# Altium PCB EST_MainV20.PcbDoc (part 6 of 7)
Units mil, origin at the board's own origin, x right, y up, seen from the top; angles counter-clockwise.
Board outline 2745 x 4540 mil, 2 copper layers (Top Layer, Bottom Layer); 326 components, 241 nets, 1052 pads, 399 vias.
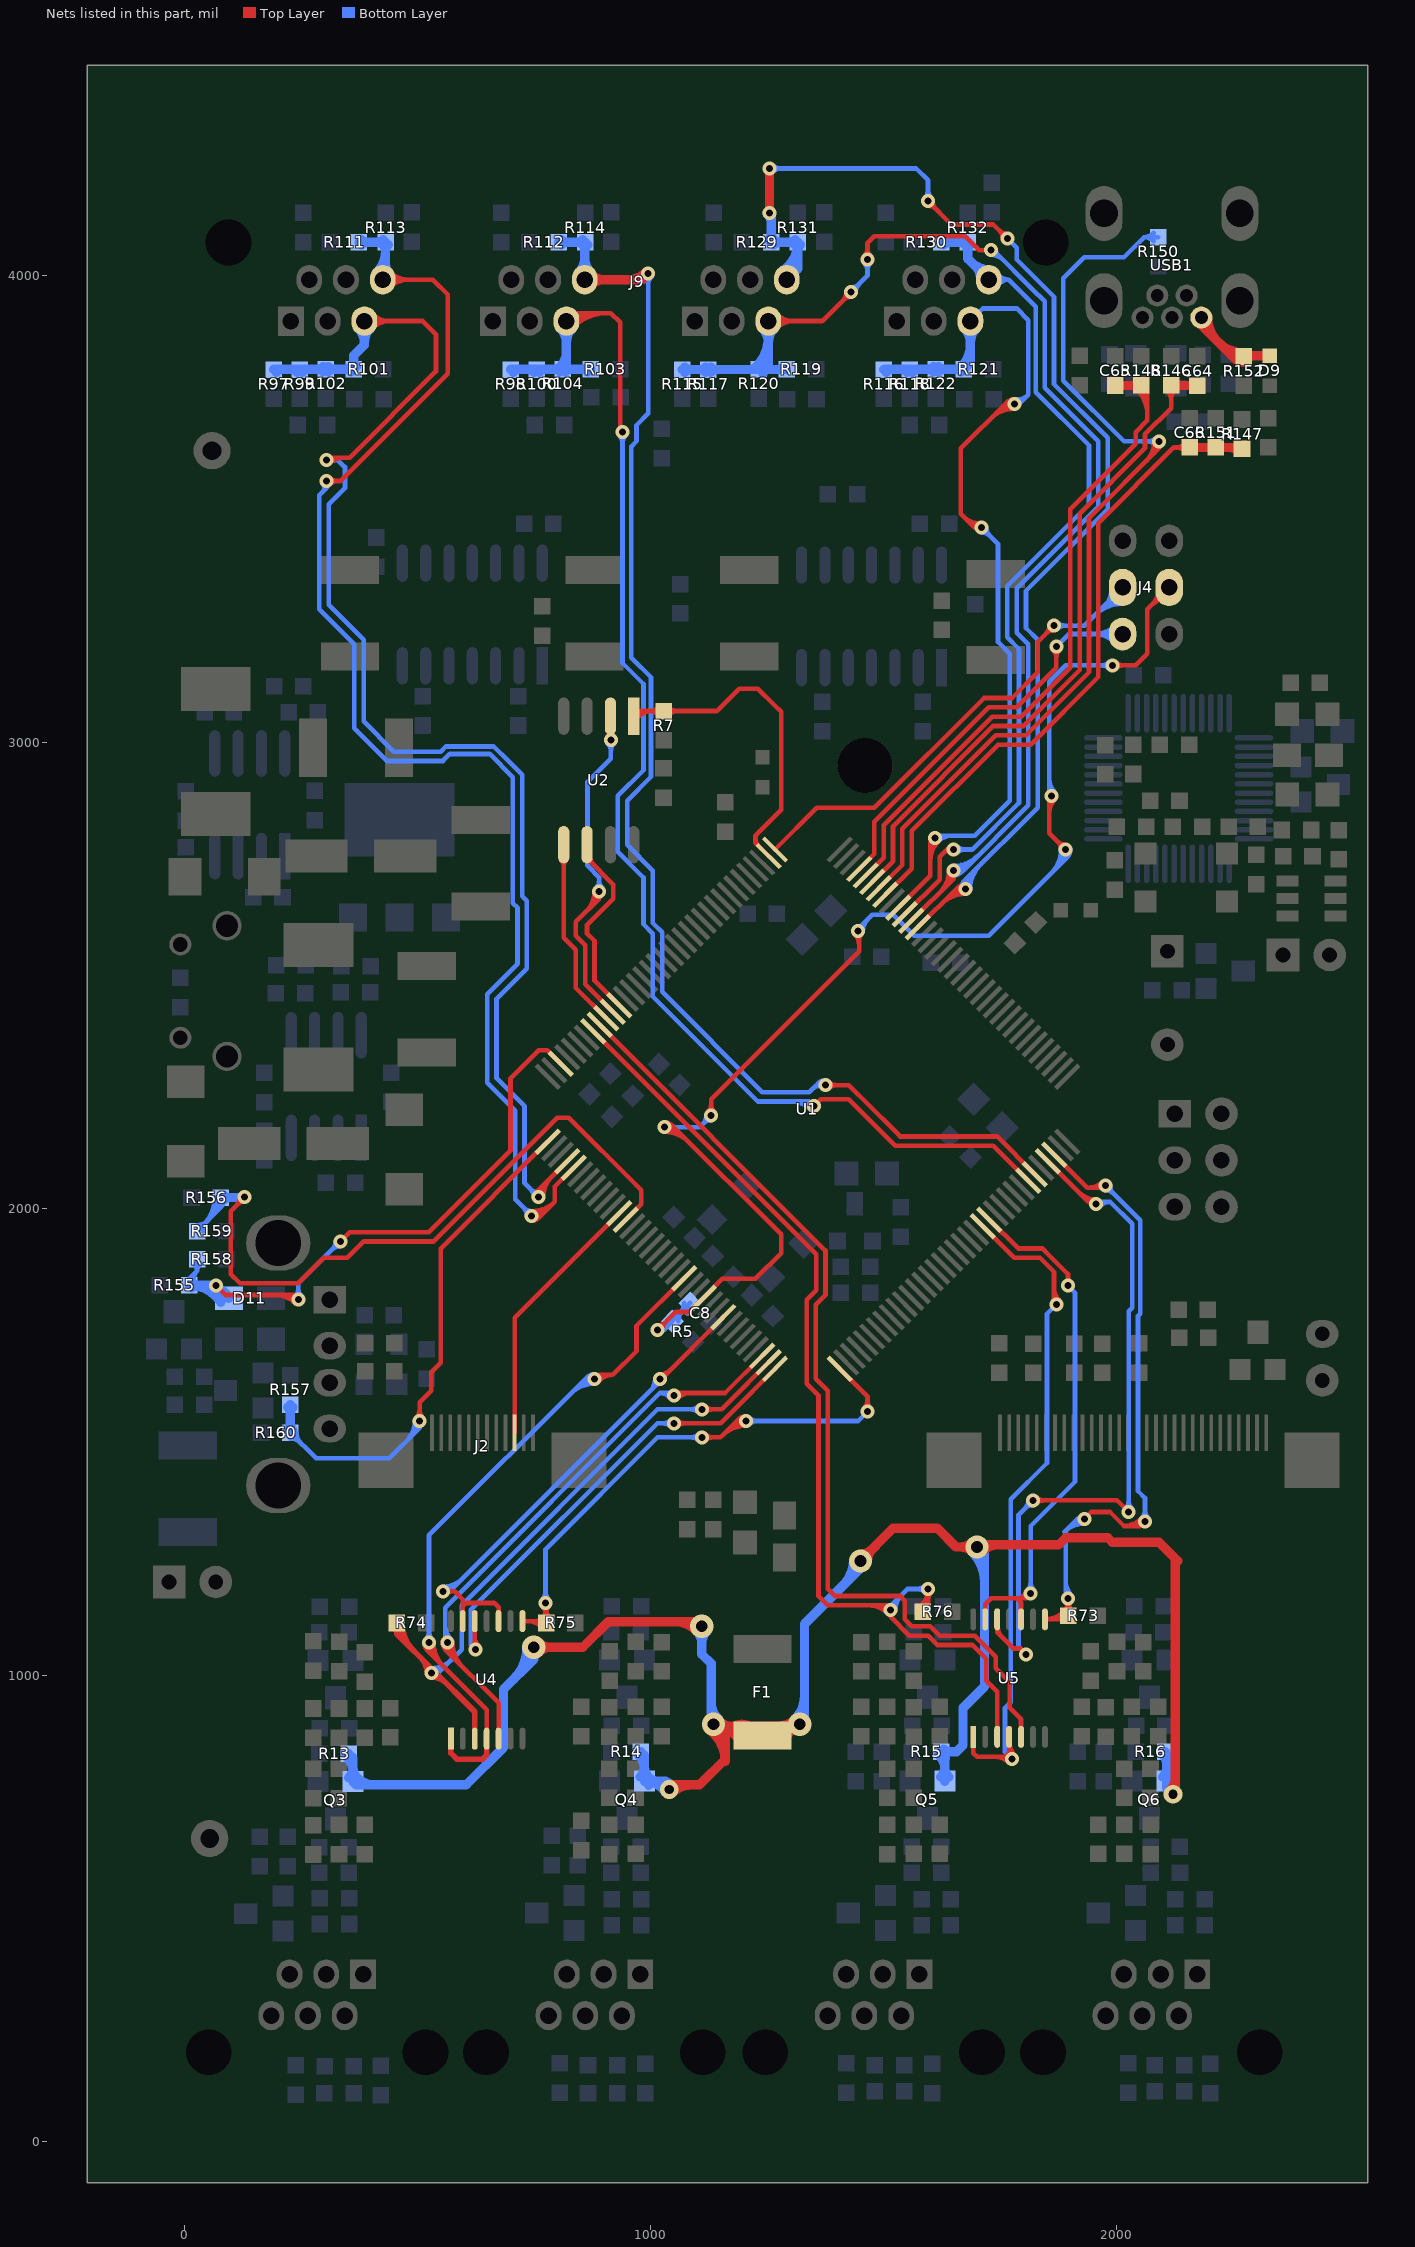
[diagram p6: the nets of this part, all layers, seen from the top]

## Via types
v1: diameter 30, hole 15, Top Layer to Bottom Layer, 237 vias
v2: diameter 50, hole 25, Top Layer to Bottom Layer, 93 vias
v3: diameter 40, hole 20, Top Layer to Bottom Layer, 68 vias
v4: diameter 60, hole 25, Top Layer to Bottom Layer, 1 vias

## Nets (pads, with @x,y where several pads share a name; then routed paths per layer and width w, separated by ;. In a path a pad name is that pad's centre, name@x,y a point inside that pad or via, vN(x,y) a via of type N, cw(c..) or ccw(c..) an arc to the next point about the centre after c; other vN are vias at no path point) (continued)
PB_CON: R157.2 R160.2 U1.1 | length 1335.2
  Top Layer w10: v1@497.93,1552.07 ccw(c480.86,1569.14) 505,1569.14 ccw(c529.14,1569.14) v1@512.07,1552.07 ; v1(505,1545) 505,1585 530,1610 530,1650 550,1670 550,1914.71 779.06,2143.77 U1.1@779.73,2143.77
  Bottom Layer w10: R160.2@227.99,1507.3 cw(c227.99,1476.6) 249.7,1498.31 cw(c271.41,1520.02) R160.2@240.71,1520.02 ; R160.2@227.99,1520.02 283.01,1465 440,1465 505,1530 v1(505,1545) cw(c468.79,1545) 494.39,1519.39 ; 477.32,1502.32 ccw(c434.64,1545) v1@495,1545
  Bottom Layer w20: R160.2@222.54,1525.47 ccw(c209.36,1538.65) 227.99,1538.65 ccw(c246.62,1538.65) R160.2@233.45,1525.47 ; R157.2@222.56,1574.55 cw(c209.44,1561.44) 227.99,1561.44 ; R160.2@227.99,1520.02 R157.2@228.02,1580.01 ; 227.99,1561.32 cw(c246.7,1561.32) R157.2@233.47,1574.55
PB_DET: D11.1 R155.1 R158.2 U1.142 | length 1653.5
  Top Layer w10: v1(68.02,1835.98) 89,1815 235,1815 v1(245,1805) ccw(c220.86,1780.86) 220.86,1815 ; 196.72,1815 cw(c196.72,1756.72) v1@237.93,1797.93 ; v1(335,1930) 355,1950 525,1950 700,2125 700,2280 760,2340 778.37,2340 U1.142@807.57,2310.8
  Bottom Layer w10: R155.1@11,1835.98 11,1850 28.01,1867.01 ; R155.1@13.51,1837.02 cw(c30,1843.79) 17.39,1856.39 ; R158.2@20.53,1881.7 cw(c9.84,1867.01) 28.01,1867.01 ; R155.1@22.76,1840.82 cw(c45.04,1849.98) 28.01,1867.01 ; R158.2@28.01,1891.98 28.01,1867.01 ; R158.2@35.49,1881.7 ccw(c46.17,1867.01) 28.01,1867.01 ; v1@237.93,1812.07 ccw(c220.86,1829.14) 245,1829.14 ccw(c269.14,1829.14) v1@252.07,1812.07 ; v1(245,1805) 245,1840 v1(335,1930) ; v1@325,1930 cw(c300.86,1930) 317.93,1912.93 cw(c335,1895.86) v1@335,1920
  Bottom Layer w20: R155.1@16.46,1830.53 cw(c29.63,1817.35) 29.63,1835.98 cw(c29.63,1854.61) R155.1@16.46,1841.44 ; 48.22,1835.98 cw(c48.22,1779.69) D11.1@95.17,1810.76 ; D11.1@78.49,1799.72 ccw(c11,1755.05) R155.1@11,1835.98 v1(68.02,1835.98) D11.1@96,1808
PB_VOL: R156.1 R159.2 U1.13 | length 1753.9
  Top Layer w10: v1@120,2025 cw(c95.86,2025) 112.93,2007.93 cw(c130,1990.86) v1@130,2015 ; v1(130,2025) 100,1995 100,1860 120,1840 245,1840 300,1895 350,1895 385,1930 535,1930 800,2195 825,2195 970,2050 980,2040 980,2009.97 U1.13@946.77,1976.73
  Bottom Layer w10: R159.2@28.01,1951.98 79,2002.98 R156.1@79,2023.98 ; R159.2@28.01,1964.7 ccw(c28.01,1995.4) 49.72,1973.69 ccw(c71.42,1951.98) R159.2@40.72,1951.98 ; R159.2@42.44,1966.41 ccw(c-15.13,2023.98) R156.1@66.28,2023.98 ; 59.51,1983.48 ccw(c19.01,2023.98) R156.1@76.28,2023.98 ; 76.58,2000.55 ccw(c53.15,2023.98) R156.1@86.28,2023.98
  Bottom Layer w20: R156.1@79,2019 R156.1@79,2023.98 128.98,2023.98 v1(130,2025) ; R156.1@84.46,2018.53 cw(c97.63,2005.35) 97.63,2023.98 cw(c97.63,2042.61) R156.1@84.46,2029.44
RED: J2.3 U1.12 | length 563.5
  Top Layer w10: J2.3@708.63,1520 708.63,1766.44 U1.12@932.85,1990.65
RST: C8.2 J4.4 R5.1 U1.25 | length 3644.1
  Top Layer w10: v1(1015,1740) 1053.87,1778.87 1082.96,1778.87 U1.25@1113.8,1809.7 1154.1,1850 1225,1850 1280,1905 1280,1945 1050,2175 v1(1030,2175) cw(c1030,2126.72) 1064.14,2160.86 ; v1@1015,1750 ccw(c1015,1774.14) 1032.07,1757.07 ccw(c1049.14,1740) v1@1025,1740 ; v1@1030,2165 cw(c1030,2092.57) 1081.21,2143.79 ; v1@1030,2185 cw(c1030,2160.86) 1047.07,2177.93 ; v1@1122.93,2207.07 ccw(c1105.86,2224.14) 1130,2224.14 ccw(c1154.14,2224.14) v1@1137.07,2207.07 ; v1(1130,2200) 1130,2235 1447.5,2552.5 v1@1447.5,2592.5 ; v1@1437.93,2587.93 cw(c1414.82,2564.82) 1447.5,2564.82 ; 1447.5,2576.89 cw(c1463.11,2576.89) v1@1452.07,2587.93 ; 1855,2848.79 cw(c1896.21,2848.79) v1@1867.07,2877.93 ; v1@1855,2880 1855,2805 v1(1890,2770) ; v1@1880,2770 ccw(c1855.86,2770) 1872.93,2787.07 ccw(c1890,2804.14) v1@1890,2780 ; v1(1990,3165) 2040,3165 2065,3190 2065,3285 J4.4@2112,3332 ; v1@1997.07,3157.93 cw(c2014.14,3140.86) 2014.14,3165 cw(c2014.14,3189.14) v1@1997.07,3172.07 ; 2074.48,3294.48 cw(c2105.56,3263.41) J4.4@2110.4,3307.09 ; 2077.53,3297.53 ccw(c2053.54,3321.53) J4.4@2087.47,3321.53
  Bottom Layer w10: v1@1017.01,1749.8 ccw(c1023.6,1782.01) R5.1@1046.86,1758.76 ; v1(1030,2175) 1105,2175 v1(1130,2200) ; 1033.72,1745.62 cw(c1019.14,1760.2) v1(1015,1740) 1028.1,1740 R5.1@1046.86,1758.76 ; v1@1037.07,2167.93 cw(c1054.14,2150.86) 1054.14,2175 cw(c1054.14,2199.14) v1@1037.07,2182.07 ; R5.1@1046.86,1771.48 ccw(c1046.86,1799.19) 1066.45,1779.59 ; R5.1@1059.57,1758.76 cw(c1093.26,1758.76) 1069.44,1782.58 ; C8.2@1072.12,1797.98 cw(c1041.42,1797.98) 1063.13,1776.27 cw(c1084.83,1754.56) C8.2@1084.83,1785.26 ; 1074.73,1780.27 1080,1775 ; C8.2@1084.83,1797.98 1046.86,1760 R5.1@1046.86,1758.76 ; v1@1120,2200 cw(c1095.86,2200) 1112.93,2182.93 cw(c1130,2165.86) v1@1130,2190 ; v1(1445,2595) 1445,2600 1475,2630 1520,2630 1565,2585 1725,2585 1890,2750 v1(1890,2770) cw(c1841.72,2770) 1875.86,2735.86 ; v1@1445,2605 ccw(c1445,2617.07) 1453.54,2608.54 ; v1@1455,2595 cw(c1491.21,2595) 1465.61,2620.61 ; v1@1855,2880 1855,3130 1890,3165 v1(1990,3165) ; 1855,2921.21 ccw(c1896.21,2921.21) v1@1867.07,2892.07 ; 1858.79,2718.79 ccw(c1807.57,2770) v1@1880,2770 ; 1892.93,2752.93 ccw(c1875.86,2770) v1@1900,2770 ; v1@1982.93,3157.93 ccw(c1965.86,3140.86) 1965.86,3165 ccw(c1965.86,3189.14) v1@1982.93,3172.07
  other v1: 1860,2885
RXINA: R74.2 U1.35 U4.3 | length 1771
  Top Layer w10: v1(1110,1570) 1152.49,1570 1167.49,1585 U1.35@1252.99,1670.51 ; v1@1117.07,1562.93 cw(c1134.14,1545.86) 1134.14,1570 cw(c1134.14,1594.14) v1@1117.07,1577.07
  Top Layer w12: R74.2@455.72,1112.02 ccw(c510.62,1112.02) 471.8,1073.2 ; R74.2@456.01,1112.02 456.01,1088.99 ; R74.2@467.72,1112.02 ccw(c551.6,1112.02) 492.29,1052.71 ; 507.56,1037.44 cw(c475.13,1005) v1@521,1005 ; v1@530,996 cw(c530,950.13) 562.44,982.56 ; v1@530,1010 v1@532.5,1012.5 ; U4.3@623.18,864 623.18,921.82 v1@532.5,1012.5 ; 456.01,1088.99 ccw(c439.25,1088.99) 449.11,1102.54 cw(c439.25,1088.99) 456.01,1088.99 ; 456.01,1088.99 cw(c472.77,1088.99) 462.9,1102.54 ccw(c472.77,1088.99) 456.01,1088.99 ; 456.01,1088.99 v1@532.5,1012.5
  Bottom Layer w10: v1@530,1015 ccw(c530,1075.36) 572.68,1032.68 ; 555.61,1015.61 cw(c530,1041.21) v1(530,1005) 545,1005 595,1055 595,1150 1015,1570 v1(1110,1570) ; v1@1102.93,1562.93 ccw(c1085.86,1545.86) 1085.86,1570 ccw(c1085.86,1594.14) v1@1102.93,1577.07
RXINA_EN: U1.22 U4.1 U4.4 | length 1769
  Top Layer w10: v1@515,1070 ccw(c539.14,1070) 522.07,1052.93 ; v1@535,1070 ccw(c607.43,1070) 556.21,1018.79 ; 539.14,1035.86 cw(c573.28,1070) v1(525,1070) 525,1050 648.77,926.23 U4.4@648.77,864 ; v1@887.87,1628.83 cw(c918.94,1604.44) 918.94,1643.94 ; 898.37,1643.94 ccw(c898.37,1620.58) v1(880,1635) 888.94,1643.94 918.94,1643.94 ; U1.22@1072.04,1851.46 970,1749.42 970,1695 918.94,1643.94
  Top Layer w12: U4.1@572,864 572,833 585,820 640,820 648.77,828.77 U4.4@648.77,864
  Bottom Layer w10: v1@517.93,1077.07 ccw(c500.86,1094.14) 525,1094.14 ccw(c549.14,1094.14) v1@532.07,1077.07 ; v1(525,1070) 525,1300 860,1635 v1(880,1635) ccw(c880,1586.72) 845.86,1620.86 ; 828.79,1603.79 cw(c880,1552.57) v1@880,1625 ; 862.93,1637.93 cw(c880,1620.86) v1@880,1645
RXINB: R75.2 U1.37 U4.8 | length 1576.4
  Top Layer w10: U4.8@725.54,1115.97 735,1115.97 772.06,1115.97 R75.2@776.01,1112.02 776.01,1153.99 v1(775,1155) ; 735.77,1115.97 cw(c735.77,1071.77) R75.2@767.02,1103.02 ; 754.85,1115.97 ccw(c754.85,1133.17) 767.02,1121.01 ccw(c745.31,1142.72) 776.01,1142.72 ccw(c806.71,1142.72) R75.2@785,1121.01 ; v1@767.93,1147.93 cw(c748.42,1128.42) R75.2@776.01,1128.42 ; 776.01,1133.29 cw(c796.71,1133.29) v1@782.07,1147.93 ; v1(1110,1510) 1150,1510 1185,1545 v1(1205,1545) ccw(c1205,1496.72) 1170.86,1530.86 ; v1@1117.07,1502.93 cw(c1134.14,1485.86) 1134.14,1510 cw(c1134.14,1534.14) v1@1117.07,1517.07 ; 1153.79,1513.79 cw(c1205,1462.57) v1@1205,1535 ; 1187.93,1547.93 cw(c1205,1530.86) v1@1205,1555 ; U1.37@1406.11,1656.59 1465,1597.69 v1(1465,1565) ; v1@1457.93,1572.07 ccw(c1440.86,1589.14) 1465,1589.14 ccw(c1489.14,1589.14) v1@1472.07,1572.07
  Bottom Layer w10: v1@767.93,1162.07 ccw(c750.86,1179.14) 775,1179.14 ccw(c799.14,1179.14) v1@782.07,1162.07 ; v1(775,1155) 775,1270 1015,1510 v1(1110,1510) ; v1@1102.93,1502.93 ccw(c1085.86,1485.86) 1085.86,1510 ccw(c1085.86,1534.14) v1@1102.93,1517.07 ; v1(1205,1545) 1445,1545 v1(1465,1565) ; v1@1212.07,1537.93 cw(c1229.14,1520.86) 1229.14,1545 cw(c1229.14,1569.14) v1@1212.07,1552.07
RXINB_EN: U1.28 U4.10 U4.13 | length 1203.4
  Top Layer w10: v1(555,1180) 580,1180 597.59,1162.41 597.59,1147.59 ; U4.13@597.59,1115.97 597.59,1147.59 ; U4.10@674.36,1115.97 674.36,1145.64 665,1155 605,1155 597.59,1147.59 ; v1(1020,1635) 1022.61,1635 U1.28@1155.56,1767.94 ; v1@1020,1645 ccw(c1020,1675.45) 1041.53,1653.92 ; v1@1030,1635 cw(c1047.83,1635) 1035.22,1647.61
  Bottom Layer w10: v1@555,1190 ccw(c555,1250.36) 597.68,1207.68 ; 580.61,1190.61 cw(c555,1216.21) v1(555,1180) 570,1180 v1@1020,1630 ; 999.39,1609.39 ccw(c973.79,1635) v1@1010,1635 ; 1011.46,1621.46 cw(c1020,1612.93) v1@1020,1625
RXINC: R76.2 U1.137 U5.3 | length 2462.2
  Top Layer w10: U1.137@877.17,2380.4 1355,1902.56 1355,1825 1335,1805 1335,1625 1360,1600 1360,1170 1380,1150 1505,1150 v1(1515,1140) ; 1466.72,1150 cw(c1466.72,1091.72) v1@1507.93,1132.93 ; 1490.86,1150 cw(c1490.86,1115.86) v1(1515,1140) ; R76.2@1576.12,1145.99 ccw(c1545.27,1185) v1(1595,1185) 1595,1147.01 R76.2@1584.01,1136.02 ; R76.2@1582.32,1138.15 ccw(c1561.61,1164.34) 1595,1164.34 ; v1@1587.93,1177.93 cw(c1570.86,1160.86) 1595,1160.86 cw(c1619.14,1160.86) v1@1602.07,1177.93 ; U5.3@1743.18,868 1743.18,965 1720,988.18 1720,1035 1690,1065 1615,1065 1595,1085 1555,1085 1515,1125 v1(1515,1140)
  Bottom Layer w10: 1521.37,1155.37 ccw(c1536.74,1140) v1(1515,1140) 1515,1149.01 1550.99,1185 v1(1595,1185) ; v1@1525,1140 cw(c1570.88,1140) 1538.44,1172.44 ; v1@1587.93,1177.93 ccw(c1570.86,1160.86) 1570.86,1185 ccw(c1570.86,1209.14) v1@1587.93,1192.07
RXINC_EN: U1.59 U5.1 U5.4 | length 1578.4
  Top Layer w10: U5.1@1692,868 1692,833 1700,825 1760,825 1768.77,833.77 ; U1.59@1712.33,1962.81 1780.15,1895 1835,1895 1865,1865 1865,1800 v1(1870,1795) ; 1738.79,825 cw(c1738.79,783.79) v1@1767.93,812.93 ; 1768.77,835.04 ccw(c1790.04,835.04) v1(1775,820) 1768.77,826.23 1768.77,833.77 ; U5.4@1768.77,859.18 ccw(c1814.18,859.18) v1@1782.07,827.07 ; U5.4@1768.77,868 1768.77,833.77 ; 1865,1831.21 ccw(c1906.21,1831.21) v1@1877.07,1802.07
  Bottom Layer w10: v1(1775,820) 1760,835 1760,930 1772,942 1772,1377 1850,1455 1850,1775 v1(1870,1795)
RXIND: R73.2 U1.70 U5.8 | length 1778.6
  Top Layer w10: U5.8@1845.54,1119.97 1892.06,1119.97 R73.2@1896.01,1116.02 ; U5.8@1845.88,1119.97 ccw(c1845.88,1178.15) 1887.02,1137.01 ccw(c1867.74,1156.28) v1@1895,1156.28 ; U1.70@1865.45,2115.93 1936.37,2045 v1@1980,2045 ; 1870.02,1119.97 ccw(c1870.02,1154) R73.2@1894.09,1129.94 ; v1@1887.93,1157.93 cw(c1870.86,1140.86) 1895,1140.86 cw(c1919.14,1140.86) v1@1902.07,1157.93 ; v1@1895,1161.15 ccw(c1929.14,1161.15) R73.2@1905,1137.01 ; v1(1895,1165) 1895,1129.02 R73.2@1896.01,1128.02 ; v1(1930,1335) 1945,1350 1985,1350 2015,1320 ; 1938.79,2045 ccw(c1938.79,2086.21) v1@1967.93,2057.07 ; 2037.5,1320 ccw(c2037.5,1350.31) v1(2060,1330) 2050,1320 2015,1320 ; v1@2052.58,1336.7 cw(c2015,1370.62) 2015,1320
  Bottom Layer w10: 1887.32,1307.32 cw(c1930,1264.64) v1@1930,1325 ; 1890,1201.21 ccw(c1931.21,1201.21) v1@1902.07,1172.07 ; v1(1895,1165) 1890,1170 1890,1310 1915,1335 v1(1930,1335) ccw(c1930,1298.79) 1904.39,1324.39 ; v1@1975,2040 cw(c1975,2015.86) 1992.07,2032.93 cw(c2009.14,2050) v1@1985,2050 ; v1@1980,2045 2050,1975 2050,1775 2045,1770 2045,1395 2060,1380 v1(2060,1330) ; v1@2052.93,1337.07 ccw(c2035.86,1354.14) 2060,1354.14 ccw(c2084.14,1354.14) v1@2067.07,1337.07
  other v1: 1975,2050
RXIND_EN: U1.60 U5.10 U5.13 | length 1251.4
  Top Layer w10: U5.13@1717.59,1119.97 1717.59,1152.59 1730,1165 1785,1165 ; U1.60@1726.25,1976.73 1787.99,1915 1840,1915 1850,1905 ; U5.10@1794.36,1119.97 1794.36,1155.64 1785,1165 ; 1800,1165 ccw(c1800,1181.25) v1(1815,1175) 1805,1165 1785,1165 ; v1@1805.77,1178.85 cw(c1785,1187.5) 1785,1165 ; 1845,1910 1850,1905 ; v1(1895,1835) 1895,1860 1850,1905
  Bottom Layer w10: v1@1807.93,1182.07 ccw(c1790.86,1199.14) 1815,1199.14 ccw(c1839.14,1199.14) v1@1822.07,1182.07 ; v1(1815,1175) 1815,1230 ; 1815,1245 1815,1230 ; 1815,1295 1815,1285 ; v1(1895,1835) 1910,1820 1910,1415 1815,1320 1815,1285 ; 1815,1230 1815,1285
SPI0_CLK: U1.133 U2.6 | length 445.8
  Top Layer w10: U2.6@864,2745.41 cw(c864,2731.91) 873.54,2741.46 ; U2.6@864,2780.41 864,2751 920,2695 920,2665 864,2609 864,2590 880,2574 880,2488.92 U1.133@932.85,2436.07 ; U2.6@871,2752.41 ccw(c891.3,2752.41) 876.95,2738.05
SPI0_CS: R7.1 U1.110 U2.1 | length 884.7
  Top Layer w10: U2.1@961.88,3058.12 cw(c983.31,3036.69) 983.31,3067 ; U2.1@964,3056 975,3067 R7.1@1027.98,3067 1142,3067 1190,3115 1230,3115 1265,3080 1280,3065 1280,2855 1225,2800 1225,2784.21 U1.110@1252.99,2756.22 ; U2.1@968.95,3051.05 cw(c1007.46,3012.54) 1007.46,3067 ; R7.1@1018.99,3058.01 ccw(c997.28,3036.3) 997.28,3067 ccw(c997.28,3097.7) R7.1@1018.99,3075.99 ; R7.1@1036.98,3058.01 cw(c1058.68,3036.3) 1058.68,3067 cw(c1058.68,3097.7) R7.1@1036.98,3075.99 ; 1225,2793.37 ccw(c1247.1,2793.37) U1.110@1231.47,2777.74
SPI0_DI: U1.134 U2.2 | length 934.9
  Top Layer w10: 862.32,2637.32 ccw(c819.64,2680) v1@880,2680 ; 879.39,2654.39 ccw(c853.79,2680) v1(890,2680) 890,2665 840,2615 840,2585 860,2565 860,2481.08 U1.134@918.93,2422.15 ; v1@907.93,3012.07 ccw(c893.27,3026.73) U2.2@914,3026.73 ; U2.2@909.05,3023.05 cw(c897.1,3011.1) 914,3011.1 cw(c930.9,3011.1) U2.2@918.95,3023.05 ; U2.2@914,3031.56 ccw(c941.56,3031.56) v1@922.07,3012.07 ; U2.2@914,3056 914,3006 v1(915,3005)
  Bottom Layer w10: v1@882.93,2687.07 ccw(c865.86,2704.14) 890,2704.14 ccw(c914.14,2704.14) v1@897.07,2687.07 ; v1(890,2680) 890,2710 865,2735 865,2915 915,2965 v1(915,3005) ; v1@907.93,2997.93 cw(c890.86,2980.86) 915,2980.86 cw(c939.14,2980.86) v1@922.07,2997.93
SPI0_DO: U1.135 U2.5 | length 436.4
  Top Layer w10: U2.5@809.05,2747.46 cw(c797.1,2735.51) 814,2735.51 cw(c830.9,2735.51) U2.5@818.95,2747.46 ; U2.5@814,2780.41 814,2581 840,2555 840,2473.24 U1.135@905.01,2408.23
SWCLK: J4.3 U1.109 | length 1272.6
  Top Layer w10: U1.109@1266.91,2770.14 1356.77,2860 1480,2860 1715,3095 1775,3095 1830,3150 1830,3215 v1(1865,3250) ; v1@1855,3250 cw(c1830.86,3250) 1847.93,3232.93 cw(c1865,3215.86) v1@1865,3240
  Bottom Layer w10: v1(1865,3250) 1930,3250 J4.3@2012,3332 J4.3@2024,3332 ; v1@1872.07,3242.93 cw(c1889.14,3225.86) 1889.14,3250 cw(c1889.14,3274.14) v1@1872.07,3257.07 ; 1952.25,3272.25 cw(c2012,3212.5) J4.3@2012,3297 ; 1969.32,3289.32 cw(c2012,3246.64) J4.3@2012,3307 ; 1977.53,3297.53 ccw(c1953.54,3321.53) J4.3@1987.47,3321.53 ; 1986.39,3306.39 cw(c2012,3280.79) J4.3@2012,3317
SWDIO: J4.5 U1.105 | length 1037.8
  Top Layer w10: U1.105@1447.86,2728.38 1480,2760.52 1480,2830 1725,3075 1785,3075 1870,3160 v1(1870,3205) ; v1@1862.93,3197.93 cw(c1845.86,3180.86) 1870,3180.86 cw(c1894.14,3180.86) v1@1877.07,3197.93
  Bottom Layer w10: v1(1870,3205) 1897,3232 J4.5@2012,3232 J4.5@2024,3232 ; J4.5@1994.66,3214.66 ccw(c1952.79,3172.79) 1952.79,3232 ccw(c1952.79,3291.21) J4.5@1994.66,3249.34 ; J4.5@2001.73,3221.73 ccw(c1976.93,3196.93) 1976.93,3232 ccw(c1976.93,3267.07) J4.5@2001.73,3242.27
TACHOA0: J9.5 R97.1 R99.1 R101.2 R102.2 U1.4 | length 3479.6
  Top Layer w10: v1@305,3610 355,3610 540,3795 540,3875 512.02,3902.98 J9.5@386.57,3902.98 ; v1@312.07,3597.93 cw(c341.21,3568.79) 341.21,3610 ; J9.5@395.45,3894.1 cw(c416.89,3872.66) 416.89,3902.98 cw(c416.89,3933.3) J9.5@395.45,3911.86 ; J9.5@402.53,3887.03 cw(c441.04,3848.52) 441.04,3902.98 cw(c441.04,3957.44) J9.5@402.53,3918.93 ; v1@770,2025 cw(c831.6,2025) 788.04,2068.56 ; 770.97,2051.49 ccw(c797.46,2025) v1(760,2025) 760,2040.52 U1.4@821.49,2102.01
  Bottom Layer w10: v1(305,3605) 330,3605 345,3590 345,3545 310,3510 310,3295 385,3220 385,3045 450,2980 550,2980 561,2991 664,2991 695,2960 ; 700,2955 695,2960 ; 725,2675 725,2680 ; v1@750,2025 ccw(c725.86,2025) 742.93,2042.07 ccw(c760,2059.14) v1@760,2035 ; v1(760,2025) 730,2055 730,2220 670,2280 670,2450 735,2515 735,2660 725,2670 725,2680 ; 695,2960 725,2930 725,2680
  Bottom Layer w20: R97.1@192.02,3799 193.01,3799.99 R102.2@303.98,3799.99 R101.2@364.01,3799.98 364.01,3829.01 386.57,3851.57 J9.5@386.57,3902.98 ; R97.1@197.47,3793.54 cw(c213.04,3777.98) 213.04,3799.99 ; 226.99,3799.99 cw(c226.99,3777.98) R99.1@242.56,3793.54 ; R99.1@253.47,3793.54 cw(c269.04,3777.98) 269.04,3799.99 ; R102.2@298.53,3794.54 ccw(c285.35,3781.36) 285.35,3799.99 ccw(c285.35,3818.62) R102.2@298.53,3805.45 ; R102.2@309.44,3794.54 cw(c322.59,3781.38) 322.59,3799.98 ; R102.2@309.44,3805.45 ccw(c322.63,3818.64) 322.63,3799.98 ; R101.2@358.55,3794.53 ccw(c345.38,3781.35) 345.38,3799.98 ccw(c345.38,3818.61) 358.55,3805.44 ccw(c345.38,3818.61) 364.01,3818.61 ccw(c382.64,3818.61) R101.2@369.46,3805.44 ; J9.5@374.16,3886.63 cw(c344.18,3856.65) 386.57,3856.65 cw(c428.97,3856.65) J9.5@398.99,3886.63
TACHOA1: J9.6 R111.1 R113.2 U1.5 | length 3496.7
  Top Layer w10: v1(305,3560) 335,3560 565,3790 565,3960 533.28,3991.72 J9.6@425.94,3991.72 ; v1@312.07,3552.93 cw(c329.14,3535.86) 329.14,3560 cw(c329.14,3584.14) v1@312.07,3567.07 ; J9.6@434.82,3982.84 cw(c456.26,3961.4) 456.26,3991.72 cw(c456.26,4022.04) J9.6@434.82,4000.6 ; J9.6@441.9,3975.77 cw(c480.41,3937.26) 480.41,3991.72 cw(c480.41,4046.18) J9.6@441.9,4007.67 ; v1@744.79,1975 ccw(c745.29,1998.44) 761.86,1981.86 ; v1@745.21,1995 ccw(c746.68,2063.32) 795,2015 ; 778.43,1998.43 cw(c745.98,2030.88) v1(745,1985) 765,1985 795,2015 ; U1.5@835.41,2088.09 795,2047.68 795,2015
  Bottom Layer w10: 297.5,3537.5 ccw(c289.57,3545.44) v1@297.73,3553.14 ; 304.78,3544.78 ccw(c297.06,3552.5) v1(305,3560) 305,3545 290,3530 290,3285 365,3210 365,3030 435,2960 510,2960 ; 535,2960 510,2960 ; 650,2975 630,2975 ; v1@735,1985 ccw(c710.86,1985) 727.93,2002.07 ccw(c745,2019.14) v1@745,1995 ; v1(745,1985) 710,2020 710,2210 650,2270 650,2460 715,2525 715,2645 705,2655 705,2925 655,2975 630,2975 ; 510,2960 555,2960 570,2975 630,2975
  Bottom Layer w20: R111.1@375,4071.98 R113.2@432.02,4072.01 431.99,3997.77 J9.6@425.94,3991.72 ; R111.1@380.46,4066.53 cw(c393.63,4053.35) 393.63,4071.98 cw(c393.63,4090.61) R111.1@380.46,4077.44 ; 413.33,4071.98 ccw(c413.33,4090.7) R113.2@426.56,4077.46 ; 413.44,4071.98 cw(c413.44,4053.44) 426.56,4066.55 cw(c413.44,4053.44) 431.99,4053.44 ; J9.6@413.53,4008.07 ccw(c368.95,4052.65) 431.99,4052.65 ; 431.99,4023.45 ccw(c453.73,4023.45) J9.6@438.36,4008.07 ; 431.99,4053.32 cw(c450.7,4053.32) R113.2@437.47,4066.55
TACHOB0: J9.11 R98.1 R100.1 R103.2 R104.2 U1.66 | length 3441
  Top Layer w10: J9.11@819.64,3902.98 836.66,3920 915,3920 935,3900 935,3705 935,3690 v1@935,3660 ; J9.11@821.45,3905.11 cw(c857.41,3869.15) 857.41,3920 ; J9.11@828.52,3898.04 cw(c881.55,3845.01) 881.55,3920 ; J9.11@835.6,3890.97 cw(c905.69,3820.87) 905.69,3920 ; v1(1350,2220) 1365,2235 1425,2235 1525,2135 1735.02,2135 U1.66@1809.77,2060.25
  Bottom Layer w10: v1@932.93,3657.93 cw(c915.86,3640.86) 940,3640.86 cw(c964.14,3640.86) v1@947.07,3657.93 ; v1(940,3665) 940,3170 985,3125 985,2940 930,2885 930,2765 985,2710 985,2610 1005,2590 1005,2455 1230,2230 1340,2230 v1(1350,2220) ccw(c1325.86,2195.86) 1325.86,2230 ; 1301.72,2230 cw(c1301.72,2171.72) v1@1342.93,2212.93
  Bottom Layer w20: R98.1@700.02,3799 701,3799.98 R103.2@872.01,3799.98 ; R98.1@705.47,3793.54 cw(c721.02,3778) 721.02,3799.98 ; 735.01,3799.98 cw(c735.01,3778) R100.1@750.56,3793.54 ; R100.1@761.47,3793.54 cw(c777.02,3778) 777.02,3799.98 ; R104.2@806.53,3794.54 ccw(c793.36,3781.36) 793.35,3799.99 ccw(c793.35,3818.62) 806.53,3805.45 ccw(c774.86,3837.11) 819.64,3837.11 ; J9.11@807.23,3886.63 cw(c777.25,3856.65) 819.64,3856.65 cw(c862.04,3856.65) J9.11@832.06,3886.63 ; R104.2@811.98,3799.99 819.64,3807.65 J9.11@819.64,3902.98 ; R104.2@817.44,3794.53 cw(c830.61,3781.36) 830.61,3799.99 cw(c830.62,3818.62) R104.2@817.44,3805.45 ; R103.2@866.55,3794.53 ccw(c853.38,3781.35) 853.38,3799.98 ccw(c853.38,3818.61) R103.2@866.55,3805.44
TACHOB1: J9.12 R112.1 R114.2 U1.67 | length 3304.8
  Top Layer w10: v1(1375,2265) 1425,2265 1452.5,2237.5 ; v1@1382.07,2257.93 cw(c1399.14,2240.86) 1399.14,2265 cw(c1399.14,2289.14) v1@1382.07,2272.07 ; 1440,2250 1452.5,2237.5 ; U1.67@1823.69,2074.17 1742.86,2155 1535,2155 1452.5,2237.5
  Top Layer w20: J9.12@859.02,3991.72 930,3991.72 ; J9.12@871.43,3979.3 cw(c901.41,3949.33) 901.41,3991.72 cw(c901.41,4034.11) J9.12@871.43,4004.14 ; 950.87,3991.72 ccw(c950.87,4049.13) v1@991.46,4008.54 ; 953.28,3991.72 930,3991.72 ; v1(995,4005) 981.72,3991.72 930,3991.72
  Bottom Layer w10: v1@987.93,3997.93 cw(c970.86,3980.86) 995,3980.86 cw(c1019.14,3980.86) v1@1002.07,3997.93 ; v1(995,4005) 995,3705 970,3680 970,3645 959,3634 959,3181 1001,3139 1001,2926 950,2875 950,2780 1005,2725 1005,2675 ; 1005,2680 1005,2675 ; 1344.5,2254.5 cw(c1370.51,2228.48) v1(1375,2265) 1355,2265 1340,2250 1240,2250 1025,2465 1025,2592.63 1005,2612.63 1005,2675 ; 1359,2269 cw(c1373.69,2254.3) v1@1376.22,2274.93
  Bottom Layer w20: R112.1@803,4071.98 R114.2@860.02,4072.01 859.02,4071.01 J9.12@859.02,3991.72 ; R112.1@808.46,4066.53 cw(c821.63,4053.35) 821.63,4071.98 cw(c821.63,4090.61) R112.1@808.46,4077.44 ; 841.33,4071.98 ccw(c841.33,4090.7) R114.2@854.56,4077.46 ; 841.44,4071.98 cw(c841.44,4053.44) R114.2@854.56,4066.55 ; J9.12@846.6,4008.07 ccw(c816.62,4038.05) 859.02,4038.05 ccw(c901.41,4038.05) J9.12@871.43,4008.07 ; 859.02,4050.96 cw(c881.06,4050.96) R114.2@865.47,4066.55
TACHOC0: J9.17 R115.1 R117.1 R119.2 R120.2 U1.97 | length 3505.5
  Top Layer w10: J9.17@1252.72,3902.98 1367.98,3902.98 v1(1430,3965) ; J9.17@1261.6,3894.1 cw(c1283.04,3872.66) 1283.04,3902.98 cw(c1283.04,3933.3) J9.17@1261.6,3911.86 ; J9.17@1268.67,3887.03 cw(c1307.18,3848.52) 1307.18,3902.98 cw(c1307.18,3957.44) J9.17@1268.67,3918.93 ; v1@1420,3965 cw(c1395.86,3965) 1412.93,3947.93 cw(c1430,3930.86) v1@1430,3955 ; v1@1457.93,4042.07 ccw(c1440.86,4059.14) 1465,4059.14 ccw(c1489.14,4059.14) v1@1472.07,4042.07 ; v1(1465,4035) 1465,4070 1480,4085 1675,4085 1705,4055 v1(1730,4055) ; U1.97@1559.22,2617.03 1650,2707.81 v1(1650,2725) cw(c1608.49,2725) 1637.84,2695.65 ; 1620.77,2678.58 ccw(c1574.35,2725) v1@1640,2725
  Bottom Layer w10: v1(1430,3965) 1465,4000 v1(1465,4035) ; v1@1430,3975 ccw(c1430,3999.14) 1447.07,3982.07 ccw(c1464.14,3965) v1@1440,3965 ; v1@1457.93,4027.93 cw(c1440.86,4010.86) 1465,4010.86 cw(c1489.14,4010.86) v1@1472.07,4027.93 ; v1@1650,2715 ccw(c1650,2739.14) 1667.07,2722.07 ; v1@1650,2735 ccw(c1650,2807.43) 1701.21,2756.21 ; 1684.14,2739.14 cw(c1650,2773.28) v1(1650,2725) 1670,2725 1810,2865 1810,3210 1785,3235 1785,3330 1960,3505 1960,3645 1845,3760 1845,3945 1817.5,3972.5 ; v1@1730,4045 cw(c1730,4008.79) 1755.61,4034.39 ; v1(1730,4055) 1735,4050 1740,4050 1817.5,3972.5 ; v1@1740,4055 ccw(c1752.07,4055) 1743.54,4046.46 ; 1825,3965 1817.5,3972.5
  Bottom Layer w20: R115.1@1068.02,3799 R117.1@1124.02,3799 R119.2@1291.02,3799 ; R115.1@1073.47,3793.54 cw(c1086.65,3780.37) 1086.65,3799 cw(c1086.65,3817.63) R115.1@1073.47,3804.46 ; R117.1@1118.56,3793.54 ccw(c1105.39,3780.37) 1105.39,3799 ccw(c1105.39,3817.63) R117.1@1118.56,3804.46 ; R117.1@1129.47,3793.54 cw(c1142.65,3780.37) 1142.65,3799 cw(c1142.65,3817.63) R117.1@1129.47,3804.46 ; 1210.96,3799 ccw(c1210.96,3821.02) 1226.53,3805.45 ccw(c1163.3,3868.67) 1252.72,3868.67 ; R120.2@1237.44,3805.45 ccw(c1253.01,3821.02) 1253.01,3799 ; J9.17@1240.3,3886.63 cw(c1210.32,3856.65) 1252.72,3856.65 cw(c1295.11,3856.65) J9.17@1265.13,3886.63 ; R120.2@1240.67,3791.31 ccw(c1211.59,3820.39) 1252.72,3820.39 ; 1252.72,3801.28 J9.17@1252.72,3902.98 ; 1271,3799 ccw(c1271,3820.99) R119.2@1286.55,3805.44
TACHOC1: J9.18 R129.1 R131.2 U1.96 | length 3313.1
  Top Layer w10: U1.96@1573.14,2603.11 1655.03,2685 v1(1675,2685) ccw(c1675,2636.79) 1640.91,2670.88 ; v1@1595,4150 cw(c1595,4125.86) 1612.07,4142.93 cw(c1629.14,4160) v1@1605,4160 ; v1(1595,4160) 1645,4110 1735,4110 v1(1765,4080) ; 1623.84,2653.81 cw(c1675,2602.65) v1@1675,2675 ; 1657.98,2687.95 cw(c1675,2670.94) v1@1675,2695 ; v1@1755,4080 ccw(c1730.86,4080) 1747.93,4097.07 ccw(c1765,4114.14) v1@1765,4090
  Top Layer w20: v1(1255,4135) v1(1255,4230)
  Bottom Layer w10: v1(1255,4230) 1570,4230 1595,4205 v1(1595,4160) ; v1@1262.07,4222.93 cw(c1279.14,4205.86) 1279.14,4230 cw(c1279.14,4254.14) v1@1262.07,4237.07 ; v1@1587.93,4167.07 ccw(c1570.86,4184.14) 1595,4184.14 ccw(c1619.14,4184.14) v1@1602.07,4167.07 ; v1@1665,2685 cw(c1689.14,2685) 1672.07,2702.07 ; v1@1685,2685 cw(c1757.43,2685) 1706.21,2736.21 ; 1689.14,2719.14 ccw(c1723.28,2685) v1(1675,2685) 1675,2705 1830,2860 1830,3220 1805,3245 1805,3325 1980,3500 1980,3652.63 1865,3767.63 1865,3955 1785,4035 1785,4060 v1(1765,4080)
  Bottom Layer w20: v1@1250,4135 1259,4126 R129.1@1259,4071.98 ; v1@1251.46,4131.46 cw(c1233.27,4113.27) 1259,4113.27 ; R129.1@1253.54,4077.44 ccw(c1240.37,4090.61) 1259,4090.61 ccw(c1277.63,4090.61) 1264.46,4077.44 ccw(c1277.57,4090.56) 1277.57,4072.01 ; R129.1@1259,4071.98 R131.2@1316.02,4072.01 ; R129.1@1264.46,4066.53 cw(c1277.69,4053.3) 1277.69,4072.01 ; J9.18@1282.53,4010.39 ccw(c1242.58,4072.01) R131.2@1316.02,4072.01 ; J9.18@1292.09,3991.72 1316.02,4015.65 R131.2@1316.02,4072.01 ; J9.18@1293.41,3993.61 ccw(c1266.45,4035.2) 1316.02,4035.2 ; R131.2@1310.56,4077.46 cw(c1297.39,4090.64) 1297.39,4072.01 cw(c1297.39,4053.38) 1310.56,4066.55 cw(c1297.39,4053.38) 1316.02,4053.38 cw(c1334.65,4053.38) R131.2@1321.47,4066.55
TACHOD0: J9.23 R116.1 R118.1 R121.2 R122.2 U1.99 | length 2590.4
  Top Layer w10: U1.99@1531.38,2644.86 1600,2713.48 1600,2785 v1(1610,2795) ccw(c1634.14,2770.86) 1600,2770.86 ; 1600,2746.72 cw(c1658.28,2746.72) v1@1617.07,2787.93 ; 1672.5,3482.5 ccw(c1703.6,3513.59) v1@1708.81,3469.93 ; 1687.06,3467.94 ccw(c1706.7,3487.59) v1(1710,3460) 1695,3460 1665,3490 1665,3630 1760,3725 v1(1780,3725) ccw(c1780,3676.72) 1745.86,3710.86 ; 1728.79,3693.79 cw(c1780,3642.57) v1@1780,3715 ; 1762.93,3727.93 cw(c1780,3710.86) v1@1780,3735
  Bottom Layer w10: v1(1610,2795) 1615,2800 1695,2800 1770,2875 1770,3190 1745,3215 1745,3425 v1(1710,3460) ; v1@1617.07,2787.93 cw(c1646.21,2758.79) 1646.21,2800 ; J9.23@1685.79,3902.98 1712.81,3930 1785,3930 1810,3905 1810,3745 ; v1@1710,3450 cw(c1710,3425.86) 1727.07,3442.93 cw(c1744.14,3460) v1@1720,3460 ; v1@1781.14,3734.93 ccw(c1785.15,3769.85) 1810,3745 ; 1795.35,3730.35 cw(c1782.13,3743.58) v1(1780,3725) 1790,3725 1810,3745
  Bottom Layer w20: R116.1@1500.02,3799 1501,3799.98 R121.2@1672.01,3799.98 1685.79,3813.76 J9.23@1685.79,3902.98 ; R116.1@1505.47,3793.54 cw(c1521.02,3778) 1521.02,3799.98 ; 1535.01,3799.98 cw(c1535.01,3778) R118.1@1550.56,3793.54 ; R118.1@1561.47,3793.54 cw(c1577.02,3778) 1577.02,3799.98 ; R122.2@1606.53,3794.54 ccw(c1593.36,3781.36) 1593.35,3799.99 ccw(c1593.35,3818.62) R122.2@1606.53,3805.45 ; R122.2@1617.44,3794.53 cw(c1630.61,3781.36) 1630.61,3799.99 cw(c1630.62,3818.62) R122.2@1617.44,3805.45 ; R121.2@1666.55,3794.53 ccw(c1653.38,3781.35) 1653.38,3799.98 ccw(c1653.38,3818.61) 1666.55,3805.44 ccw(c1620.12,3851.88) 1685.79,3851.88 ; J9.23@1673.37,3886.63 cw(c1643.39,3856.65) 1685.79,3856.65 cw(c1728.18,3856.65) J9.23@1698.2,3886.63
TACHOD1: J9.24 R130.1 R132.2 U1.98 | length 2145.7
  Top Layer w10: U1.98@1545.3,2630.95 1620,2705.65 1620,2755 1635,2770 v1(1650,2770) ccw(c1646.7,2742.41) 1627.06,2762.06
  Bottom Layer w10: v1(1650,2770) 1690,2770 1790,2870 1790,3200 1765,3225 1765,3335 1940,3510 1940,3636.58 1826,3750.58 1826,3934 1768.28,3991.72 J9.24@1725.16,3991.72 J9.24@1748.28,3991.72 ; v1@1657.07,2762.93 cw(c1674.14,2745.86) 1674.14,2770 cw(c1674.14,2794.14) v1@1657.07,2777.07 ; J9.24@1743.69,3978.86 cw(c1768.28,3961.79) 1768.28,3991.72 cw(c1768.28,4021.65) J9.24@1743.69,4004.58
  Bottom Layer w20: R130.1@1623,4071.98 R132.2@1680.02,4072.01 1680.02,4036.86 J9.24@1725.16,3991.72 ; R130.1@1628.46,4066.53 cw(c1641.69,4053.3) 1641.69,4072.01 ; R130.1@1628.46,4077.44 ccw(c1641.57,4090.56) 1641.57,4072.01 ; R132.2@1674.56,4077.46 cw(c1661.39,4090.64) 1661.39,4072.01 cw(c1661.39,4053.38) 1674.56,4066.55 cw(c1661.39,4053.38) 1680.02,4053.38 cw(c1698.65,4053.38) R132.2@1685.47,4066.55 ; 1688.46,4028.42 ccw(c1725.16,4065.11) J9.24@1725.16,4013.22 ; 1697.96,4018.91 cw(c1674.71,3995.66) J9.24@1707.6,3995.66
TXINA: U1.34 U4.5 | length 1432
  Top Layer w10: v1@555,1070 ccw(c579.14,1070) 562.07,1052.93 ; v1@560,1070 560,1055 674.36,940.64 U4.5@674.36,864 ; v1(565,1070) ccw(c613.28,1070) 579.14,1035.86 ; v1@575,1070 ccw(c647.43,1070) 596.21,1018.79 ; v1(1050,1600) 1055,1605 1159.65,1605 U1.34@1239.07,1684.43 ; v1@1057.07,1592.93 cw(c1086.21,1563.79) 1086.21,1605
  Bottom Layer w10: v1@560,1070 560,1145 1020,1605 ; 560,1106.21 ccw(c601.21,1106.21) v1@572.07,1077.07 ; v1@1042,1594 ccw(c1020,1577.5) 1020,1605 ; v1@1045,1605 1020,1605
TXINB: U1.36 U4.12 | length 1203.1
  Top Layer w10: v1@617.93,1062.07 ccw(c605.25,1074.75) 623.18,1074.75 ; 623.18,1083.53 ccw(c653.53,1083.53) v1@632.07,1062.07 ; U4.12@623.18,1115.97 623.18,1056.82 v1(625,1055) ; v1(1050,1540) 1150.32,1540 1175.32,1565 U1.36@1266.91,1656.59 ; v1@1057.07,1532.93 cw(c1074.14,1515.86) 1074.14,1540 cw(c1074.14,1564.14) v1@1057.07,1547.07
  Bottom Layer w10: 615,1079.14 ccw(c649.14,1079.14) v1(625,1055) 615,1065 615,1140 1015,1540 v1(1050,1540) ; 615,1103.28 ccw(c673.28,1103.28) v1@632.07,1062.07 ; v1@1042.93,1532.93 ccw(c1025.86,1515.86) 1025.86,1540 ccw(c1025.86,1564.14) v1@1042.93,1547.07
TXINC: U1.136 U5.5 | length 2074.3
  Top Layer w10: U1.136@891.09,2394.32 1375,1910.4 1375,1815 1354,1794 1354,1636 1380,1610 1380,1225 1380,1185 1395,1170 1535,1170 1545,1160 1545,1120 1560,1105 1600,1105 1620,1085 1695,1085 1740,1040 1740,1015 1765,990 ; 1760,995 1765,990 ; U5.5@1794.36,868 1794.36,905.64 1770,930 1770,985 1765,990
TXIND: U1.69 U5.12 | length 1756.2
  Top Layer w10: U5.12@1743.18,1119.97 1743.18,1091.82 1777.5,1057.5 1792.5,1057.5 v1(1805,1045) ; U5.12@1744.48,1102.65 ccw(c1773.76,1102.65) 1753.06,1081.94 ; v1(1820,1375) 2000,1375 v1(2025,1350) ; v1@1827.07,1367.93 cw(c1844.14,1350.86) 1844.14,1375 cw(c1844.14,1399.14) v1@1827.07,1382.07 ; U1.69@1851.53,2102.01 1938.53,2015 v1@1960,2015 ; 1918.36,2035.18 ccw(c1955,2071.82) v1@1955,2020 ; 1935.43,2018.11 ccw(c1955,2037.68) v1(1955,2010)
  Bottom Layer w10: v1(1805,1045) 1789,1061 1789,1344 v1(1820,1375) ; v1@1810,1375 cw(c1785.86,1375) 1802.93,1357.93 cw(c1820,1340.86) v1@1820,1365 ; v1@1960,2015 1985,2015 ; v1@1963,2004 cw(c1985,1987.5) 1985,2015 ; v1@2017.93,1357.07 ccw(c2000.86,1374.14) 2025,1374.14 ccw(c2049.14,1374.14) v1@2032.07,1357.07 ; v1(2025,1350) 2025,1780 2032.5,1787.5 2032.5,1967.5 1985,2015
USB_DET: C66.2 R147.1 R151.2 U1.101 | length 1562.9
  Top Layer w10: U1.101@1503.54,2672.7 1560,2729.16 1560,2810 1745,2995 1815,2995 1960,3140 1960,3470 2122.13,3632.12 C66.2@2156.16,3632.12 ; C66.2@2147.17,3623.13 ccw(c2125.46,3601.42) 2125.46,3632.13 ccw(c2125.46,3662.83) C66.2@2147.17,3641.12
  Top Layer w20: C66.2@2156.16,3632.12 2264.89,3632.12 R147.1@2268.02,3629 ; C66.2@2161.61,3626.67 cw(c2174.79,3613.5) 2174.79,3632.12 cw(c2174.79,3650.75) C66.2@2161.61,3637.58 ; 2193.07,3632.12 cw(c2193.07,3613.1) R151.2@2206.53,3626.55 ; 2193.64,3632.12 ccw(c2193.64,3650.35) R151.2@2206.53,3637.46 ; R151.2@2217.44,3626.55 cw(c2230.9,3613.1) 2230.9,3632.12 ; R151.2@2217.44,3637.46 ccw(c2230.33,3650.35) 2230.33,3632.12 ; 2241.84,3632.13 cw(c2241.84,3602.83) R147.1@2262.56,3623.54
USB_P: D9.1 R152.1 USB1.1 | length 368.8
  Top Layer w20: USB1.1@2180.87,3910.5 2180.87,3894.13 2246.14,3828.86 D9.1@2327.91,3828.86 ; USB1.1@2194.49,3910.5 ccw(c2266.89,3910.5) 2215.69,3859.31 ; 2217.87,3857.13 ccw(c2271.98,3911.25) R152.1@2271.98,3834.72 ; 2248.86,3828.86 cw(c2248.86,3803.87) R152.1@2266.53,3821.54 ; 2252.01,3822.99 ccw(c2271.98,3842.96) R152.1@2271.98,3814.72 ; R152.1@2277.44,3821.54 cw(c2295.11,3803.87) 2295.11,3828.86
USBDM: C64.2 R146.1 U1.103 | length 1518.7
  Top Layer w10: U1.103@1475.7,2700.54 1520,2744.84 1520,2820 1735,3035 1800,3035 1920,3155 1920,3490 2060,3630 2060,3660 2116.02,3716.02 R146.1@2116.02,3765 ; R146.1@2107.02,3756.01 cw(c2085.32,3734.3) 2116.02,3734.3 cw(c2146.72,3734.3) R146.1@2125.01,3756.01
  Top Layer w20: R146.1@2116.02,3765 2171.28,3765 C64.2@2172.16,3764.12 ; R146.1@2121.47,3759.54 cw(c2134.65,3746.37) 2134.65,3765 cw(c2134.65,3783.63) R146.1@2121.47,3770.46 ; 2151.42,3765 cw(c2151.42,3743.38) C64.2@2166.7,3758.67
USBDP: C65.1 R148.1 U1.104 | length 1594.8
  Top Layer w10: U1.104@1461.78,2714.46 1500,2752.68 1500,2822.63 1732.37,3055 1795,3055 1900,3160 1900,3500 2040,3640 2040,3665 2065,3690 2065,3747.02 2052.02,3760 R148.1@2052.02,3765 ; R148.1@2043.02,3756.01 cw(c1989.97,3702.95) 2065,3702.95 ; R148.1@2050.1,3763.08 cw(c2014.11,3727.1) 2065,3727.1 ; R148.1@2053.81,3752.41 cw(c2055.26,3742.28) 2062.5,3749.52 cw(c2066.59,3753.6) R148.1@2062.03,3757.17 ; R148.1@2057.17,3770.15 cw(c2038.25,3751.24) R148.1@2065,3751.24
  Top Layer w20: C65.1@1995.96,3765 R148.1@2052.02,3765 ; C65.1@2001.3,3759.43 cw(c2014.76,3745.97) 2014.76,3765 ; C65.1@2001.3,3770.34 ccw(c2014.19,3783.23) 2014.19,3765 ; R148.1@2046.56,3759.54 ccw(c2033.39,3746.37) 2033.39,3765 ccw(c2033.39,3783.63) R148.1@2046.56,3770.46
USBID: R150.1 U1.102 | length 2123.8
  Top Layer w10: U1.102@1489.62,2686.62 1540,2737 1540,2815 1740,3015 1805,3015 1940,3150 1940,3480 2090,3630 v1(2090,3645) cw(c2053.79,3645) 2079.39,3619.39 ; 2062.32,3602.32 ccw(c2019.64,3645) v1@2080,3645
  Bottom Layer w10: R150.1@2078.88,4074.15 ccw(c2058,4053.94) 2058,4083 ; R150.1@2078.88,4091.85 cw(c2058,4112.06) 2058,4083 ; v1@2082.93,3637.93 ccw(c2065.86,3620.86) 2065.86,3645 ccw(c2065.86,3669.14) v1@2082.93,3652.07 ; R150.1@2088.02,4083 2058,4083 ; v1(2090,3645) 2015,3645 1885,3775 1885,3995 1930,4040 2015,4040 2058,4083
V9: F1.2 Q3.1 Q4.1 Q5.1 Q6.1 R13.1 R14.1 R15.1 R16.1 | length 6155.4
  Top Layer w20: v2(750,1060) 815,1060 ; 775,1060 815,1060 ; 920,1115 1035,1115 ; v3@1040,765 1105,765 1160,820 1160,875 1175,890 ; v3@1047.07,747.93 cw(c1088.28,706.72) 1088.28,765 ; 1049.64,1115 cw(c1049.64,1044.64) v2@1099.39,1094.39 ; v2@1110,1115 1035,1115 ; v2@1126.12,882.91 cw(c1076.88,815.95) 1160,815.95 ; v2@1137.96,899.03 cw(c1105.94,855.47) 1160,855.47 ; v2@1147,904 ccw(c1175,925) 1175,890 ; 1167.93,882.93 cw(c1196.1,854.75) F1.2@1218.99,887.37 ; 1172.18,890 cw(c1172.18,847.67) F1.2@1207.5,871 ; F1.2@1190.81,859.98 ccw(c1135,823.12) 1135,890 1175,890 ; F1.2@1232,890 1175,890 ; F1.2@1236,891 1176,891 1175,890 ; F1.2@1240,891 v2@1326,891 ; F1.2@1272.5,871 cw(c1299.25,863.11) F1.2@1299.25,891 ; F1.2@1274.13,891 ccw(c1274.13,940.87) v2@1309.39,905.61 ; F1.2@1291.68,865.34 cw(c1326,855.22) v2@1326,891 ; F1.2@1293.44,891 cw(c1293.44,868.44) v2@1309.39,884.39 ; v2@1330,895 v2@1326,891 ; v2(1450,1245) 1520,1315 1615,1315 1655,1275 v2(1700,1275) 1705,1280 1875,1280 1890,1295 1980,1295 1990,1285 2090,1285 2130,1245 ; v2@1450,1260 ccw(c1450,1296.21) 1475.61,1270.61 ccw(c1501.21,1245) v2@1465,1245 ; v2@1689.39,1264.39 ccw(c1663.79,1238.79) 1663.79,1275 ccw(c1663.79,1311.21) v2@1689.39,1285.61 ; v2@1710.61,1264.39 cw(c1748.28,1226.72) 1748.28,1280 ; v3@2112.93,752.07 ccw(c2083.79,781.21) 2125,781.21 ; v3@2125,755 2125,1245 ; 786.21,1060 ccw(c786.21,1023.79) 760.61,1049.39 cw(c786.21,1023.79) 786.21,1060 ; 786.21,1060 cw(c786.21,1096.21) 760.61,1070.61 ccw(c786.21,1096.21) 786.21,1060 ; 815,1060 855,1060 910,1115 1035,1115
  Bottom Layer w20: R13.1@347.75,826.25 cw(c312.85,791.35) Q3.1@362.2,791.35 ; R13.1@353.2,831.7 362.2,822.7 Q3.1@362.2,771.72 368.75,765.18 605.18,765.18 685,845 685,970 750,1035 v2(750,1060) ; Q3.1@353.37,780.56 ccw(c332.03,801.9) 362.2,801.9 ccw(c392.38,801.9) 371.04,780.56 ccw(c408.18,817.7) 408.18,765.18 ; 706.72,991.72 ccw(c638.43,1060) v2@735,1060 ; 740.86,1025.86 ccw(c706.72,1060) v2@755,1060 ; R14.1@973.54,830.53 cw(c941.06,798.04) 987,798.04 ; Q4.1@978.16,781.84 ccw(c956.82,803.18) 987,803.18 ccw(c1017.18,803.18) 995.84,781.84 ccw(c1017.18,803.18) 1017.18,773 ccw(c1017.18,742.82) Q4.1@995.84,764.16 ; R14.1@979,835.98 987,827.98 Q4.1@987,773 ; 1024.86,773 cw(c1024.86,744.67) v3@1048.26,760.64 ; v3@1031.74,749.36 ccw(c987,718.84) Q4.1@987,773 ; v3@1040,765 1032,773 Q4.1@987,773 ; v2@1099.39,1094.39 cw(c1073.79,1068.79) 1110,1068.79 cw(c1146.21,1068.79) v2@1120.61,1094.39 ; v2@1110,1115 v2(1110,1105) 1110,1045 1130,1025 1130,900 v2(1135,895) ; 1130,943.28 ccw(c1183.28,943.28) v2@1145.61,905.61 ; v2@1309.39,905.61 ccw(c1259.64,955.36) 1330,955.36 ; v2@1330,895 1330,1110 1450,1230 v2(1450,1245) ; 1413.79,1193.79 ccw(c1362.57,1245) v2@1435,1245 ; R15.1@1617.54,830.53 cw(c1585.06,798.04) 1631,798.04 ; Q5.1@1622.16,781.84 ccw(c1600.82,803.18) 1631,803.18 ccw(c1661.18,803.18) Q5.1@1639.84,781.84 ; R15.1@1628.46,830.53 cw(c1641.63,817.35) 1641.63,835.98 cw(c1641.63,854.61) R15.1@1628.46,841.44 ; Q5.1@1631,773 1631,827.98 R15.1@1623,835.98 1655.98,835.98 1670,850 1670,930 1716,976 1716,1259 v2(1700,1275) ; v2@1689.39,1264.39 cw(c1625.16,1200.16) 1716,1200.16 ; v2@1703.54,1278.54 cw(c1673.44,1248.44) 1716,1248.44 ; R16.1@2097.54,830.53 cw(c2074.71,807.7) 2107,807.7 ; Q6.1@2098.16,781.84 ccw(c2076.82,803.18) 2107,803.18 ccw(c2137.18,803.18) Q6.1@2115.84,781.84 ; R16.1@2103,835.98 2107,831.98 Q6.1@2107,773 2107,758 v3(2120,745)
  other v2: 1320,895
  other v3: 1040,755

## Text inside footprints (layer, text, board x,y; h text height)
J5: Top Overlay "LEGO" at 480.27,31.72 h25 r180
J6: Top Overlay "LEGO" at 1074.76,31.72 h25 r180
J7: Top Overlay "LEGO" at 1673.19,31.72 h25 r180
J8: Top Overlay "LEGO" at 2268.86,31.72 h25 r180